# Altium PCB Relayboard.PcbDoc (part 2 of 2)
Units mm, origin at the board's own origin, x right, y up, seen from the top; angles counter-clockwise.
Board outline 76.6 x 71.56 mm, 2 copper layers (Top Layer, Bottom Layer); 43 components, 40 nets, 153 pads, 27 vias.
Unrouted connection lines stored in the file: 21.
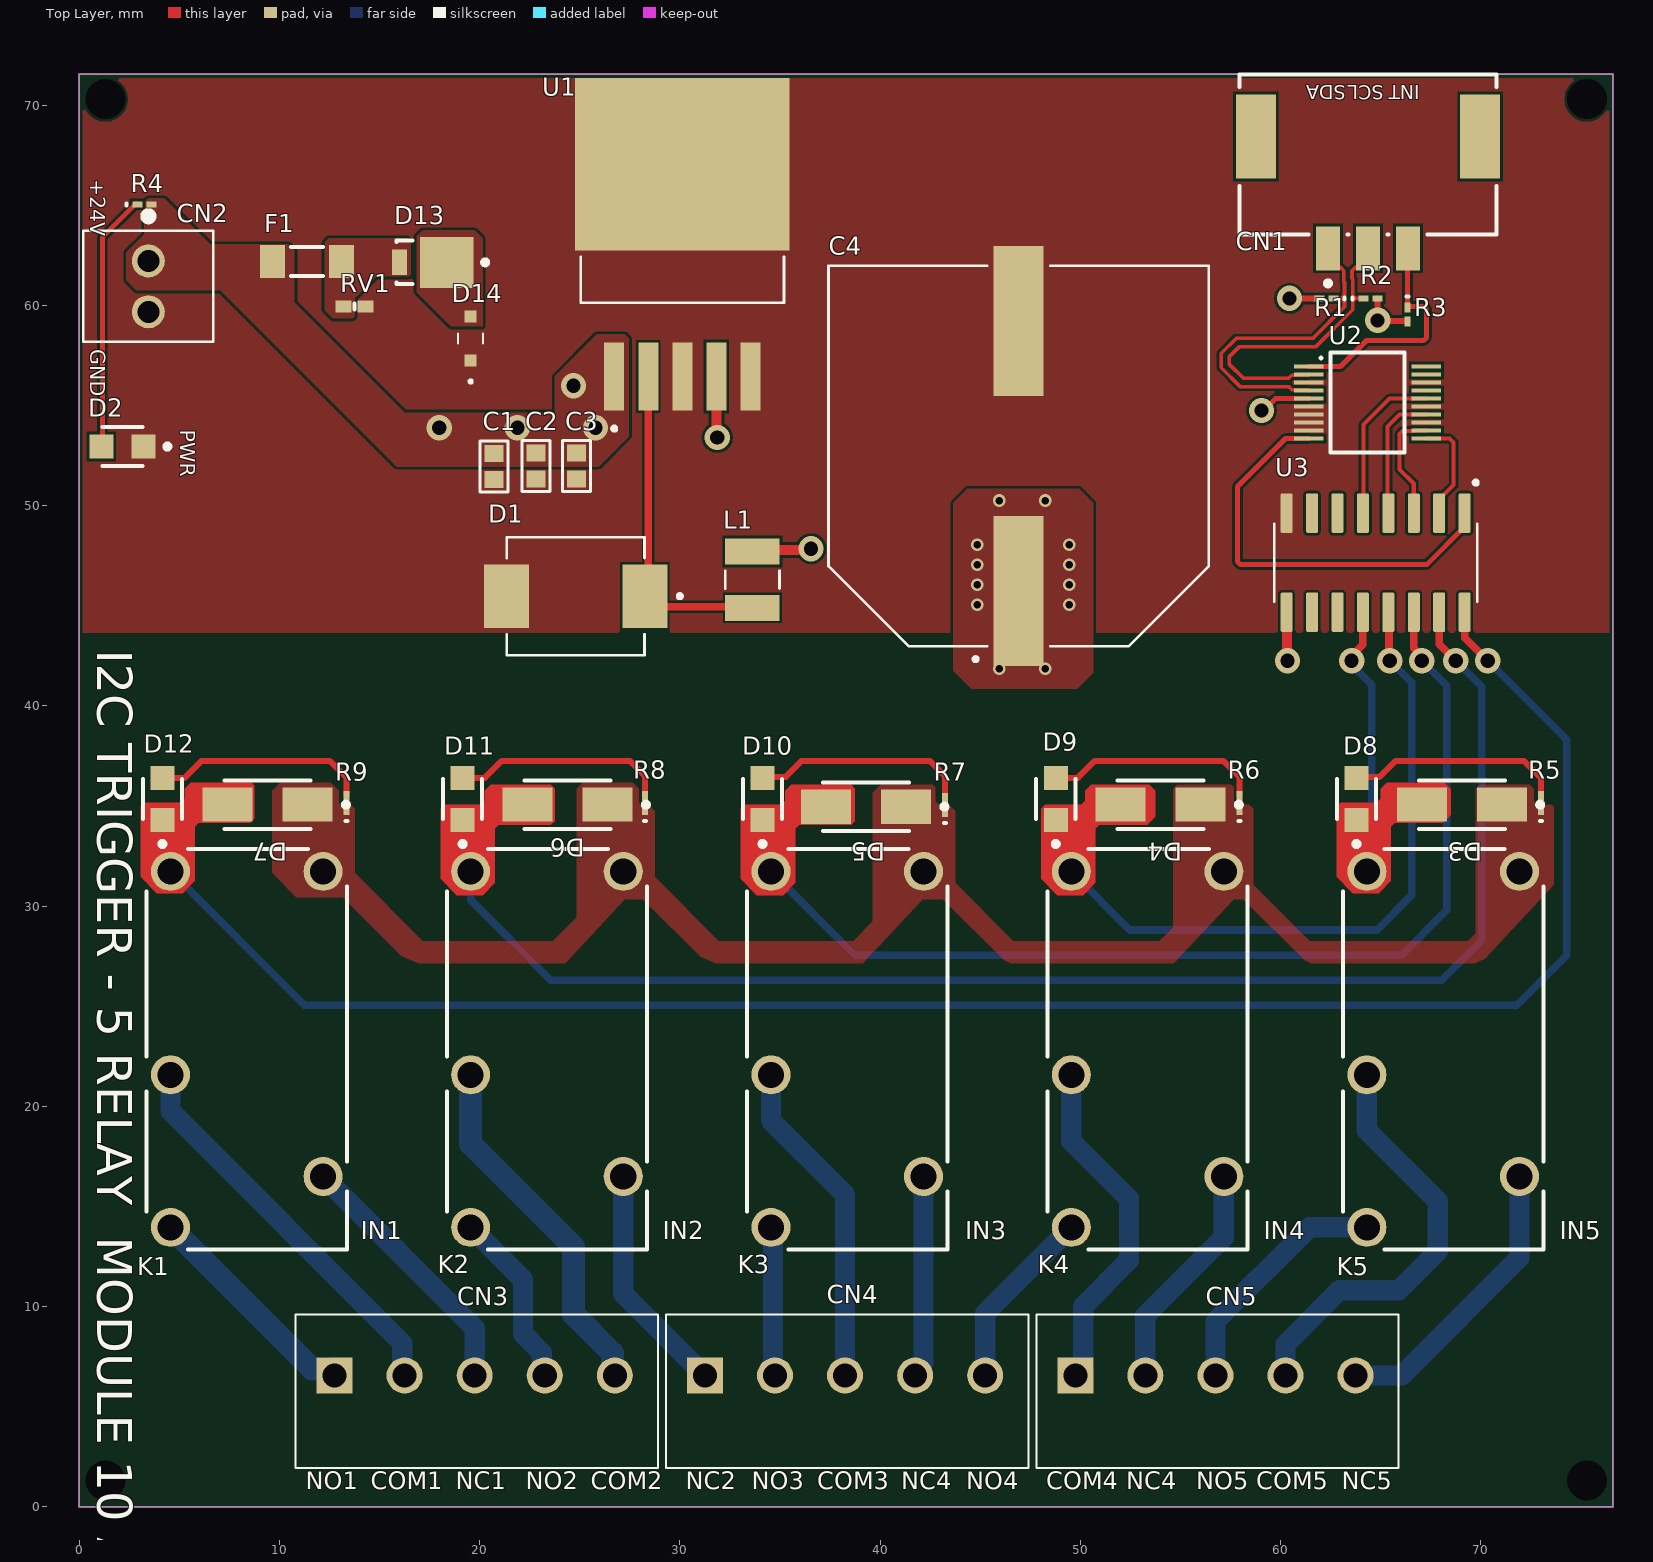
[diagram p0: Top Layer view]

## Polygon pours and split planes (outlines as drawn) (continued)
OUT4 on Top Layer "Top Layer-+24V" (solid, remove dead copper, pour order 9): 57.662,30.356 58.146,30.356 61.213,27.288 61.534,27.156 69.695,27.156 70.218,27.383 73.646,31.056 73.646,31.256 73.646,34.965 73.555,35.056 72.856,35.056 72.646,35.266 72.646,35.865 72.455,36.056 69.955,36.056 69.755,35.856 69.755,28.656 69.355,28.256 61.455,28.256 58.655,31.056 58.655,34.847 58.646,34.856 58.455,35.056 58.046,35.056 57.946,35.156 57.946,35.656 57.546,36.056 55.046,36.056 54.855,36.056 54.655,35.856 54.655,35.665 54.646,35.656 54.646,28.947 53.955,28.256 46.655,28.256 43.746,31.165 43.746,34.756 43.546,34.956 43.046,34.956 42.755,35.247 42.755,35.847 42.755,35.947 42.646,36.056 42.546,36.056 40.046,36.056 39.646,35.656 39.646,29.247 38.655,28.256 31.955,28.256 28.746,31.465 28.746,34.756 28.655,34.847 28.455,35.056 28.055,35.056 27.946,35.165 27.946,35.656 27.946,35.865 27.655,36.156 25.155,36.156 25.055,36.056 24.855,35.865 24.855,29.456 23.655,28.256 17.155,28.256 13.755,31.656 13.755,34.856 13.555,35.056 13.055,35.056 12.955,35.156 12.955,35.756 12.555,36.156 10.055,36.156 9.655,35.756 9.655,31.656 10.855,30.456 13.155,30.456 16.113,27.497 16.938,27.156 24.268,27.156 27.255,30.356 28.146,30.356 31.036,27.466 31.784,27.156 39.148,27.156 42.135,30.356 43.146,30.356 46.207,27.295 46.542,27.156 54.676,27.156
+5VDC on Top Layer "+5VDC_L01_P016" (solid, remove dead copper, pour order 16): 49.955,50.856 44.355,50.856 43.655,50.156 43.655,41.756 44.555,40.856 49.855,40.856 50.655,41.656 50.655,50.156
NetD13_1 on Top Layer "NETD13_1_L01_P014" (solid, remove dead copper, pour order 14): 16.855,63.456 16.855,60.656 18.555,58.956 20.155,58.956 20.155,63.356 19.755,63.756 17.155,63.756
OUT4 on Top Layer "OUT4_L01_P013" (solid, remove dead copper, pour order 13): 3.455,65.356 3.255,65.156 3.255,63.556 2.355,62.656 2.355,61.256 2.855,60.756 7.055,60.756 15.855,51.956 25.955,51.956 27.455,53.456 27.455,58.356 27.255,58.556 25.855,58.556 23.755,56.456 23.755,54.656 16.255,54.656 10.755,60.156 10.755,62.756 10.455,63.056 6.555,63.056 4.255,65.356
NetD13_2 on Top Layer "NETD13_2_L01_P011" (solid, remove dead copper, pour order 11): 12.455,63.356 12.255,63.156 12.255,59.756 12.655,59.356 13.655,59.356 13.755,59.456 13.755,60.356 14.855,61.456 16.455,61.456 16.555,61.556 16.555,63.156 16.355,63.356
no net on Top Layer "NONET_L01_P000" (solid, remove dead copper, pour order 0): 14.055,35.056
no net on Bottom Layer "NONET_L01_P-001" (solid, remove dead copper, pour order 26): 65.616,59.595
+5VDC on Bottom Layer "Bottom Layer-+5VDC" (solid, remove dead copper, pour order 25): 30.755,52.256 42.855,40.156 49.755,40.156 51.555,41.956 51.555,49.756 51.455,49.856 55.155,53.556 59.555,53.556 64.455,58.456 65.455,58.456 65.555,58.556 65.611,59.499 65.548,59.662 63.855,61.356 61.255,61.356 59.655,61.356 59.355,61.056 59.355,59.756 52.155,52.556 34.855,52.556 32.855,54.556 31.255,54.556 30.755,54.256
OUT4 on Bottom Layer "NONET_L01_P-001" (solid, remove dead copper, pour order 21): 59.655,43.356 61.555,43.356 61.955,42.956 61.955,30.856 61.255,30.156 56.755,30.156 55.255,31.656 55.255,40.556 57.543,43.02 58.314,43.356
OUT4 on Bottom Layer "OUT4_L02_P019" (solid, remove dead copper, pour order 19): 29.199,30.705 28.858,53.053 24.755,57.156 17.955,57.156 16.355,55.556 16.355,40.956 24.055,33.256 24.055,30.755 24.572,30.239 28.758,30.255

## Keep-outs
Keep-Out Layer:
  the board outline again, w0.1

## Other copper
Top Layer:
  region net OUT5: 65.319,36.156 65.019,35.856 65.019,35.356 64.819,35.156 63.019,35.156 62.819,34.956 62.819,31.456 63.619,30.656 64.919,30.656 65.519,31.256 65.519,33.956 65.719,34.156 68.11,34.156 68.51,34.556 68.51,35.856 68.21,36.156
  region net OUT4: 50.555,36.056 50.255,35.756 50.255,35.256 50.055,35.056 48.255,35.056 48.055,34.856 48.055,31.356 48.855,30.556 50.155,30.556 50.755,31.156 50.755,33.856 50.955,34.056 53.346,34.056 53.746,34.456 53.746,35.756 53.446,36.056
  region net OUT3: 35.555,36.056 35.255,35.756 35.255,35.256 35.055,35.056 33.255,35.056 33.055,34.856 33.055,31.356 33.855,30.556 35.155,30.556 35.755,31.156 35.755,33.856 35.955,34.056 38.555,34.056 38.746,34.247 38.746,35.865 38.555,36.056
  region net OUT2: 20.555,36.056 20.255,35.756 20.255,35.256 20.055,35.056 18.255,35.056 18.055,34.856 18.055,31.356 18.855,30.556 20.155,30.556 20.755,31.156 20.755,33.856 20.955,34.056 23.555,34.056 23.746,34.247 23.746,35.865 23.555,36.056
  region net OUT1: 5.564,36.156 5.264,35.856 5.264,35.356 5.064,35.156 3.264,35.156 3.064,34.956 3.064,31.456 3.864,30.656 5.164,30.656 5.764,31.256 5.764,33.956 5.964,34.156 8.553,34.156 8.755,34.358 8.755,36.011 8.61,36.156
Bottom Layer:
  pour cut-out: 23.655,28.956

## Silkscreen, mask and mechanical layers (free items; w line width, h text height)
Top Overlay:
  text "SDA" at 63.255,71.246 h1.2 r180
  text "SCL" at 65.155,71.246 h1.2 r180
  text "INT" at 66.955,71.253 h1.2 r180
  text "+24V" at 0.307,66.305 h1.27 r270
  text "GND" at 0.314,57.806 h1.27 r270
  text "PWR" at 4.807,53.806 h1.27 r270
  text "I2C TRIGGER - 5 RELAY  MODULE 10 A" at 0.328,42.806 h3 r270
  text "IN1" at 14.055,13.059 h1.52
  text "IN2" at 29.155,13.059 h1.52
  text "IN3" at 44.255,13.068 h1.52
  text "IN4" at 59.155,13.059 h1.52
  text "IN5" at 73.955,13.068 h1.52
  text "NO1" at 11.305,0.568 h1.5
  text "COM1" at 14.555,0.568 h1.5
  text "NC1" at 18.805,0.566 h1.5
  text "NO2" at 22.305,0.568 h1.5
  text "COM2" at 25.555,0.568 h1.5
  text "NC2" at 30.305,0.566 h1.5
  text "NO3" at 33.605,0.568 h1.5
  text "COM3" at 36.855,0.568 h1.5
  text "NC4" at 41.055,0.566 h1.5
  text "NO4" at 44.305,0.568 h1.5
  text "COM4" at 48.305,0.568 h1.5
  text "NC4" at 52.305,0.566 h1.5
  text "NO5" at 55.805,0.568 h1.5
  text "COM5" at 58.805,0.568 h1.5
  text "NC5" at 63.055,0.568 h1.5

## Dimensions
76.555,-0.148 to 76.603,71.556 on Top Overlay
76.603,0 to 0,0 on Top Overlay